# Altium PCB MCU_Control_Board.PcbDoc (part 2 of 2)
Units mil, origin at the board's own origin, x right, y up, seen from the top; angles counter-clockwise.
Board outline 5526.15 x 3406.41 mil, 2 copper layers (Top Layer, Bottom Layer); 103 components, 170 nets, 494 pads, 166 vias.
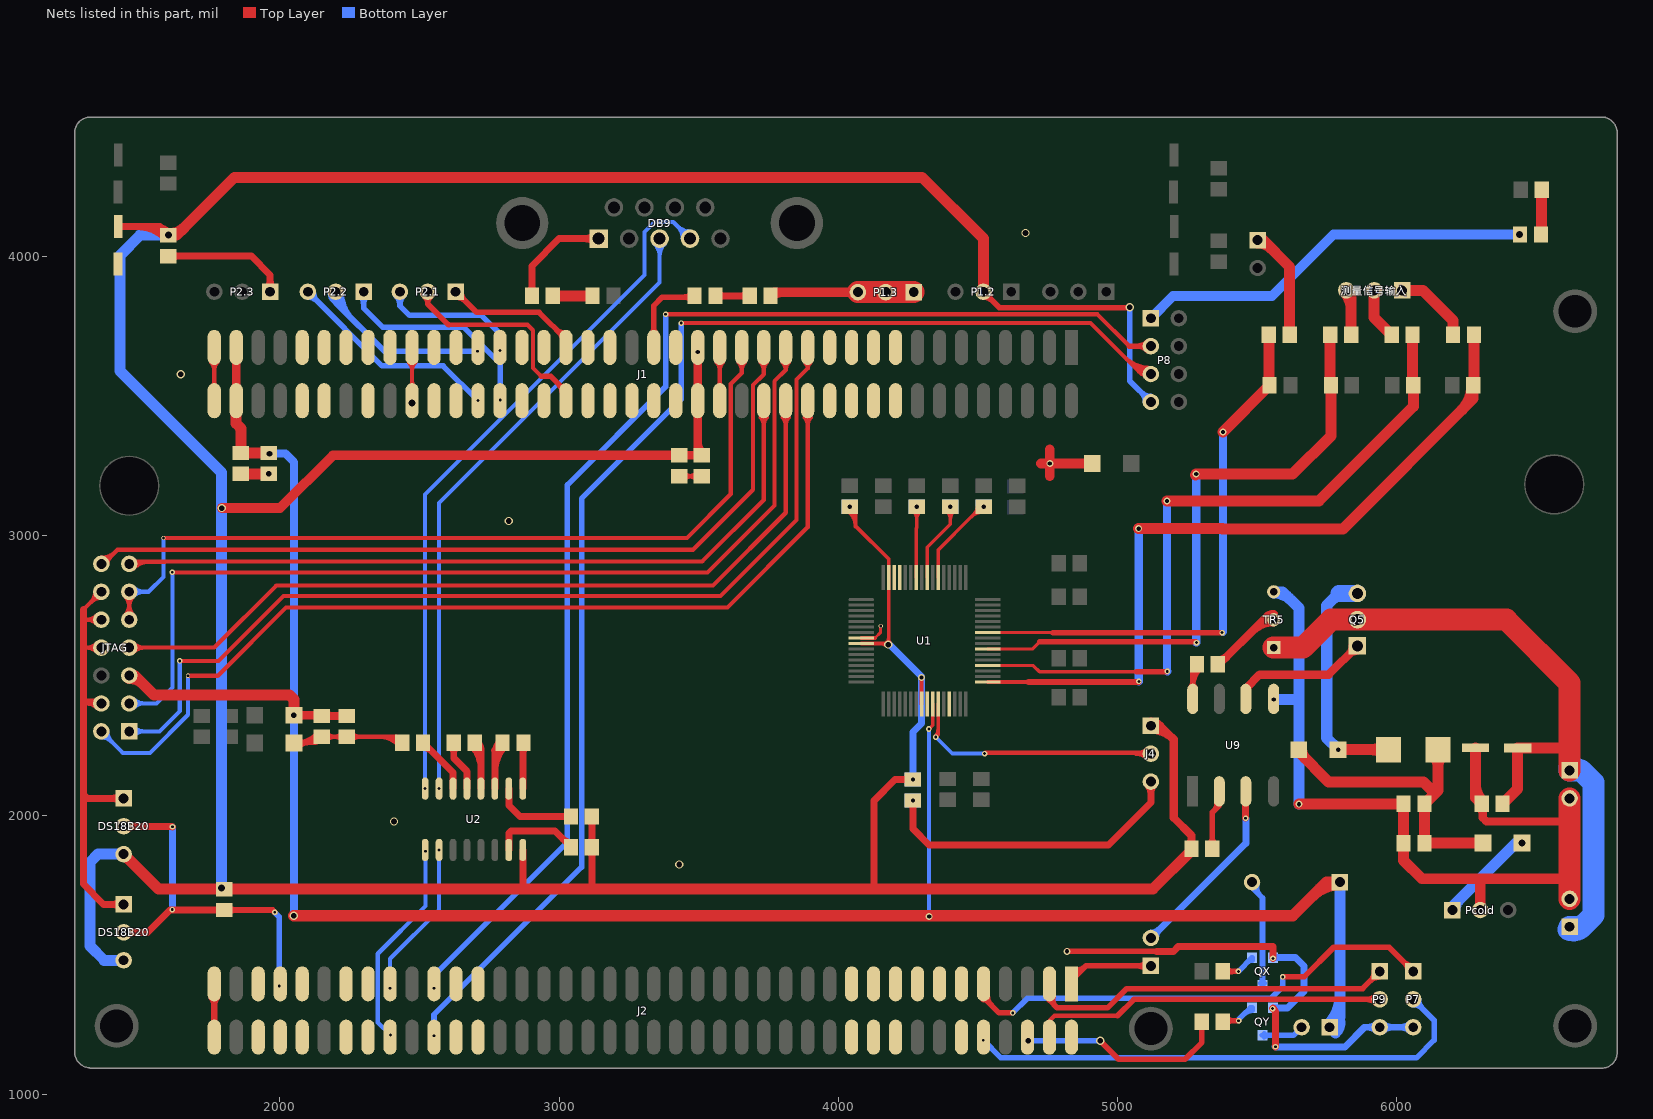
[diagram p2: the nets of this part, all layers, seen from the top]

## Via types
v1: diameter 20, hole 10, Top Layer to Bottom Layer, 45 vias
v2: diameter 25, hole 15, Top Layer to Bottom Layer, 30 vias
v3: diameter 30, hole 20, Top Layer to Bottom Layer, 26 vias
v4: diameter 19, hole 11, Top Layer to Bottom Layer, 13 vias
v5: diameter 35, hole 25, Top Layer to Bottom Layer, 10 vias
v6: diameter 17, hole 11, Top Layer to Bottom Layer, 9 vias
v7: diameter 40, hole 25, Top Layer to Bottom Layer, 8 vias
v8: diameter 20, hole 10.13, Top Layer to Bottom Layer, 7 vias
v9: diameter 20, hole 15, Top Layer to Bottom Layer, 5 vias
v10: diameter 15, hole 10, Top Layer to Bottom Layer, 4 vias
v11: diameter 25, hole 15.13, Top Layer to Bottom Layer, 2 vias
v12: diameter 20, hole 12, Top Layer to Bottom Layer, 2 vias
v13: diameter 39.37, hole 20.13, Top Layer to Bottom Layer, 2 vias
v14: diameter 15, hole 11, Top Layer to Bottom Layer, 1 vias
v15: diameter 17, hole 10, Top Layer to Bottom Layer, 1 vias
v16: diameter 17, hole 9, Top Layer to Bottom Layer, 1 vias

## Nets (pads, with @x,y where several pads share a name; then routed paths per layer and width w, separated by ;. In a path a pad name is that pad's centre, name@x,y a point inside that pad or via, vN(x,y) a via of type N, cw(c..) or ccw(c..) an arc to the next point about the centre after c; other vN are vias at no path point) (continued)
DGND: C1.1 C2.1 C3.1 C4.1 C05.2 C06.2 C07.1 C08.1 C14.2 C15.2 C26.2 C27.2 D0.2 D1.2 D2.2 DB9.5 DS18B20.1 J1.33 J1.34 J1.61 J1.62 J1.79 J1.80 J2.79 J2.80 J4.3 JTAG.4 JTAG.8 JTAG.10 JTAG.12 L0.1 L2.2 P1.3.1 P1.3.2 P1.3.3 P2.3.1 P7.3 P8.1 P9.3 QX.2 QY.2 U1.8 U1.25 U1.29 U1.61 U1.62 U2.15 | length 13718
  Top Layer w11: 4131.65,2634.29 4152,2654.63 v10(4152,2677)
  Top Layer w13: U1.8@4082.48,2634.29 4131.65,2634.29
  Top Layer w15: 1296,2592.5 1303.5,2600 JTAG.8@1360,2600 ; 1296,2736 JTAG.12@1360,2800 ; 1296.5,2700 1296,2700.5 1359.5,2700.5 JTAG.10@1360,2700 ; J1.80@1753.17,3526.4 ccw(c1725.64,3553.92) 1764.57,3553.92 ccw(c1803.49,3553.92) J1.80@1775.97,3526.4 ; J1.79@1753.17,3621.6 cw(c1725.64,3594.08) 1764.57,3594.08 cw(c1803.49,3594.08) J1.79@1775.97,3621.6 ; J1.80@1757.34,3526.38 ccw(c1739.9,3543.82) 1764.57,3543.82 ccw(c1789.23,3543.82) J1.80@1771.79,3526.38 ; J1.79@1757.34,3622.62 cw(c1739.9,3605.18) 1764.57,3605.18 cw(c1789.23,3605.18) J1.79@1771.79,3622.62 ; J1.80@1764.57,3489.63 J1.79@1764.57,3659.37 ; C14.2@2437.6,2260 2417,2280.6 C05.2@2240,2280.6 C06.2@2150,2280.6 2127.4,2258 L0.1@2050,2258 ; J1.62@2461.83,3526.4 ccw(c2434.31,3553.92) 2473.23,3553.92 ccw(c2512.15,3553.92) J1.62@2484.63,3526.4 ; J1.61@2461.83,3621.6 cw(c2434.31,3594.08) 2473.23,3594.08 cw(c2512.15,3594.08) J1.61@2484.63,3621.6 ; J1.62@2466,3526.38 ccw(c2448.56,3543.82) 2473.23,3543.82 ccw(c2497.89,3543.82) J1.62@2480.45,3526.38 ; J1.61@2466,3622.62 cw(c2448.56,3605.18) 2473.23,3605.18 cw(c2497.89,3605.18) J1.61@2480.45,3622.62 ; J1.62@2473.23,3489.63 J1.61@2473.23,3659.37 ; C1.1@3430.5,3214.1 C2.1@3510.5,3214.1 ; J1.34@3564.19,3526.4 ccw(c3536.67,3553.92) 3575.59,3553.92 ccw(c3614.51,3553.92) J1.34@3586.99,3526.4 ; J1.33@3564.19,3621.6 cw(c3536.67,3594.08) 3575.59,3594.08 cw(c3614.51,3594.08) J1.33@3586.99,3621.6 ; J1.34@3568.37,3526.38 ccw(c3550.93,3543.82) 3575.59,3543.82 ccw(c3600.26,3543.82) J1.34@3582.82,3526.38 ; J1.33@3568.37,3622.62 cw(c3550.93,3605.18) 3575.59,3605.18 cw(c3600.26,3605.18) J1.33@3582.82,3622.62 ; J1.34@3575.59,3489.63 J1.33@3575.59,3659.37 ; P1.3.3@4057,3860 P1.3.3@4070.5,3873.5 ; 1306.82,2600 cw(c1306.82,2546.82) 1344.42,2584.42 ccw(c1306.82,2546.82) 1306.82,2600 ; 1306.82,2600 ccw(c1306.82,2653.18) 1344.42,2615.58 cw(c1306.82,2653.18) 1306.82,2600 ; 1322.4,2762.4 cw(c1360,2724.79) 1360,2777.97 ccw(c1360,2724.79) 1322.4,2762.4 ; 1322.4,2762.4 ccw(c1284.79,2800) 1337.97,2800 cw(c1284.79,2800) 1322.4,2762.4 ; L0.1@2050,2258 ccw(c2050.01,2373.64) 2133.07,2293.18 cw(c2050.01,2373.64) L0.1@2050,2258 ; 2104.32,2258 cw(c2104.32,2312.32) 2065.91,2273.91 ccw(c2104.32,2312.32) 2104.32,2258 ; 2104.32,2258 ccw(c2104.32,2203.68) 2065.91,2242.09 cw(c2104.32,2203.68) 2104.32,2258 ; 2192.39,2280.6 cw(c2192.39,2236.92) 2223.27,2267.81 ccw(c2192.39,2236.92) 2192.39,2280.6 ; 2192.39,2280.6 ccw(c2192.39,2324.27) 2223.27,2293.39 cw(c2192.39,2324.27) 2192.39,2280.6 ; 2197.61,2280.6 cw(c2197.61,2324.27) 2166.73,2293.39 ccw(c2197.61,2324.27) 2197.61,2280.6 ; 2197.61,2280.6 ccw(c2197.61,2236.92) 2166.73,2267.81 cw(c2197.61,2236.92) 2197.61,2280.6 ; 2287.61,2280.6 cw(c2287.61,2324.27) 2256.73,2293.39 ccw(c2287.61,2324.27) 2287.61,2280.6 ; 2287.61,2280.6 ccw(c2287.61,2236.92) 2256.73,2267.81 cw(c2287.61,2236.92) 2287.61,2280.6 ; 3462.89,3214.1 cw(c3462.89,3170.42) 3493.77,3201.31 ccw(c3462.89,3170.42) 3462.89,3214.1 ; 3462.89,3214.1 ccw(c3462.89,3257.77) 3493.77,3226.89 cw(c3462.89,3257.77) 3462.89,3214.1 ; 3478.11,3214.1 cw(c3478.11,3257.77) 3447.23,3226.89 ccw(c3478.11,3257.77) 3478.11,3214.1 ; 3478.11,3214.1 ccw(c3478.11,3170.42) 3447.23,3201.31 cw(c3478.11,3170.42) 3478.11,3214.1 ; 1305.61,2700.5 cw(c1305.61,2645.61) 1344.42,2684.42 ccw(c1305.61,2645.61) 1305.61,2700.5 ; 1308.03,2700.5 ccw(c1308.03,2751.97) 1344.42,2715.58 cw(c1308.03,2751.97) 1308.03,2700.5 ; 2085.42,2258 ccw(c2085.42,2339.34) 2143.84,2282.75 cw(c2085.42,2339.34) 2085.42,2258 ; C06.2@2120.83,2258 ccw(c2120.83,2305.04) 2154.62,2272.31 cw(c2120.83,2305.04) C06.2@2120.83,2258 ; 2353.7,2280.6 cw(c2353.7,2180.04) 2424.81,2251.15 ccw(c2353.7,2180.04) 2353.7,2280.6 ; 2389.91,2280.6 cw(c2389.91,2216.25) 2435.41,2261.75 ccw(c2389.91,2216.25) 2389.91,2280.6
  Top Layer w20: v2@4818.5,1512.5 v2(4819.03,1511.97) 5140.42,1511.97
  Top Layer w25: 1296,2736 1296,2700.5 1296,2592.5 1296,2404.5 ; JTAG.4@1360,2400 1355.5,2404.5 1296,2404.5 ; DS18B20.1@1440,1680 1368.5,1680 1296,1752.5 1296,2074 ; DS18B20.1@1440,2060 1310,2060 1296,2074 ; C08.1@1600,4002.6 1897.9,4002.6 1965,3935.5 P2.3.1@1965,3875 ; J2.80@1756.7,1242.86 ccw(c1737.72,1261.85) 1764.57,1261.85 ccw(c1791.42,1261.85) J2.80@1772.43,1242.86 ; J2.79@1756.7,1345.14 cw(c1737.72,1326.15) 1764.57,1326.15 cw(c1791.42,1326.15) J2.79@1772.43,1345.14 ; J2.80@1764.57,1209.63 J2.79@1764.57,1379.37 ; U2.15@2820,1875 2820,1935.5 2827.5,1943 2984.6,1943 C15.2@3042.6,1885 ; D2.2@2902.6,3860 2902.6,3967.6 3000.08,4065.08 DB9.5@3141.89,4065.08 ; v2(4267.5,2052.6) 4267.5,1951 4325,1893.5 4968.5,1893.5 5120,2045 J4.3@5120,2120 ; 5140.42,1511.97 5200.97,1511.97 5218,1529 5557.5,1529 v1(5557.5,1486.5) ; v1(5556,1307) 5566.5,1296.5 v1(5566.5,1170) ; 1296,2074 1296,2404.5 ; 1398.89,1680 cw(c1398.89,1638.89) 1427.96,1667.96 ccw(c1398.89,1638.89) 1398.89,1680 ; 1398.89,1680 ccw(c1398.89,1721.11) 1427.96,1692.04 cw(c1398.89,1721.11) 1398.89,1680 ; 1398.89,2060 cw(c1398.89,2018.89) 1427.96,2047.96 ccw(c1398.89,2018.89) 1398.89,2060 ; 1398.89,2060 ccw(c1398.89,2101.11) 1427.96,2072.04 cw(c1398.89,2101.11) 1398.89,2060 ; 1635.54,4002.6 cw(c1635.54,4034.2) 1613.19,4011.85 ccw(c1635.54,4034.2) 1635.54,4002.6 ; 1635.54,4002.6 ccw(c1635.54,3971) 1613.19,3993.34 cw(c1635.54,3971) 1635.54,4002.6 ; 1965,3916.11 cw(c1923.89,3916.11) 1952.96,3887.04 ccw(c1923.89,3916.11) 1965,3916.11 ; 1965,3916.11 ccw(c2006.11,3916.11) 1977.04,3887.04 cw(c2006.11,3916.11) 1965,3916.11 ; 2902.6,3895.54 cw(c2870.99,3895.54) 2893.34,3873.19 ccw(c2870.99,3895.54) 2902.6,3895.54 ; 2902.6,3895.54 ccw(c2934.2,3895.54) 2911.85,3873.19 cw(c2934.2,3895.54) 2902.6,3895.54 ; 3091.75,4065.08 cw(c3091.75,4014.94) 3127.2,4050.39 ccw(c3091.75,4014.94) 3091.75,4065.08 ; 3091.75,4065.08 ccw(c3091.75,4115.22) 3127.2,4079.76 cw(c3091.75,4115.22) 3091.75,4065.08 ; 4267.5,2021 cw(c4299.1,2021) 4276.76,2043.34 ccw(c4299.1,2021) 4267.5,2021 ; 4267.5,2021 ccw(c4235.9,2021) 4258.24,2043.34 cw(c4235.9,2021) 4267.5,2021 ; 5120,2078.89 cw(c5161.11,2078.89) 5132.04,2107.96 ccw(c5161.11,2078.89) 5120,2078.89 ; 5120,2078.89 ccw(c5078.89,2078.89) 5107.96,2107.96 cw(c5078.89,2078.89) 5120,2078.89 ; 1308.03,2404.5 cw(c1308.03,2348.03) 1347.96,2387.96 ccw(c1308.03,2348.03) 1308.03,2404.5 ; 1329.76,2404.5 ccw(c1329.76,2430.24) 1347.96,2412.04 cw(c1329.76,2430.24) 1329.76,2404.5 ; 3013.53,1914.07 ccw(c3042.6,1943.14) 3042.6,1902.03 cw(c3042.6,1943.14) 3013.53,1914.07 ; v1@5557.77,1308.77 cw(c5536.69,1287.69) 5566.5,1287.69 ccw(c5536.69,1287.69) v1@5557.77,1308.77
  Top Layer w35: D1.2@3757.4,3860 3770.9,3873.5 P1.3.3@4070.5,3873.5 ; 4726.5,3260 v2(4758,3260) ; v2@4757,3259 v2(4758,3260) ; 4758,3214 v2(4758,3260) ; 4758,3311 v2(4758,3260) ; L2.2@4901.16,3251.16 ccw(c4879.82,3229.82) 4879.82,3260 ccw(c4879.82,3290.18) L2.2@4901.16,3268.84 ; L2.2@4910,3260 v2(4758,3260) ; D1.2@3763.12,3858.22 cw(c3800.02,3821.32) 3800.02,3873.5 ccw(c3800.02,3821.32) D1.2@3763.12,3858.22
  Top Layer w39.37: C3.1@1860,3222.6 v3(1960,3222.6)
  Top Layer w78.74: P1.3.3@4070.5,3873.5 P1.3.2@4170.5,3873.5 P1.3.1@4270.5,3873.5
  Bottom Layer w25: QY.2@5557.4,1309.21 5610.21,1309.21 5669,1368 5669,1459 5638.79,1489.21 QX.2@5557.4,1489.21 ; v1@5565.5,1171 v1(5566.5,1170) 5815,1170 5885,1240 P9.3@5940,1240 P7.3@6060,1240 ; 5898.89,1240 cw(c5898.89,1198.89) 5927.96,1227.96 ccw(c5898.89,1198.89) 5898.89,1240 ; 5898.89,1240 ccw(c5898.89,1281.11) 5927.96,1252.04 cw(c5898.89,1281.11) 5898.89,1240 ; 5981.11,1240 cw(c5981.11,1281.11) 5952.04,1252.04 ccw(c5981.11,1281.11) 5981.11,1240 ; 5981.11,1240 ccw(c5981.11,1198.89) 5952.04,1227.96 cw(c5981.11,1198.89) 5981.11,1240 ; 6018.89,1240 cw(c6018.89,1198.89) 6047.96,1227.96 ccw(c6018.89,1198.89) 6018.89,1240 ; 6018.89,1240 ccw(c6018.89,1281.11) 6047.96,1252.04 cw(c6018.89,1281.11) 6018.89,1240
  Bottom Layer w35: P8.1@5120,3780 5199.5,3859.5 5554,3859.5 5774.5,4080 v7(6441,4080)
  other v3: 3430.5,1823 2408.5,1977 2820,3053.5 1644.5,3580 4671,4085.5
  other v5: 2473.23,3475.63
DS18B20_A: DS18B20.2 J2.73 Rs.1 | length 1841.3
  Top Layer w20: Rs.1@1800,1660 1973.5,1660 v1(1981.5,1652) ; 1841.58,1660 cw(c1841.58,1697.64) 1814.96,1671.02 ccw(c1841.58,1697.64) 1841.58,1660 ; 1841.58,1660 ccw(c1841.58,1622.36) 1814.96,1648.98 cw(c1841.58,1622.36) 1841.58,1660 ; v1(1981.5,1652) ccw(c1962.19,1632.69) 1962.19,1660 cw(c1962.19,1632.69) v1(1981.5,1652)
  Top Layer w25: DS18B20.2@1440,1580 1526,1580 1606,1660 Rs.1@1800,1660 ; DS18B20.2@1440,1960 1613,1960 v1(1615,1958) ; 1481.11,1580 cw(c1481.11,1621.11) 1452.04,1592.04 ccw(c1481.11,1621.11) 1481.11,1580 ; 1481.11,1580 ccw(c1481.11,1538.89) 1452.04,1567.96 cw(c1481.11,1538.89) 1481.11,1580 ; 1481.11,1960 cw(c1481.11,2001.11) 1452.04,1972.04 ccw(c1481.11,2001.11) 1481.11,1960 ; 1481.11,1960 ccw(c1481.11,1918.89) 1452.04,1947.96 cw(c1481.11,1918.89) 1481.11,1960 ; 1764.46,1660 cw(c1764.46,1628.4) 1786.81,1650.74 ccw(c1764.46,1628.4) 1764.46,1660 ; 1764.46,1660 ccw(c1764.46,1691.6) 1786.81,1669.26 cw(c1764.46,1691.6) 1764.46,1660
  Bottom Layer w20: v1(1981.5,1652) 1981,1652 1997.5,1635.5 v1(1997.5,1387.5)
  Bottom Layer w25: v1(1614,1661.5) 1615,1662.5 v1(1615,1958)
DVDD3.3: C1.2 C2.2 C07.2 C08.2 C13.1 C15.1 C24.2 C25.2 C26.1 C27.1 DS18B20.3 J1.35 J1.36 J4.1 P1.2.2 P8.7 R50.2 Rs.2 U1.9 U1.24 U1.63 U2.16 | length 18565.8
  Top Layer w14: v2(4041.5,3104.6) 4062.5,3083.6 4062.5,3035.91 4180.91,2917.5 U1.63@4180.91,2850.82 v3@4180.91,2611 ; U1.9@4082.48,2614.6 v3@4175.9,2614.6 ; v2(4298.5,2492.5) 4299.02,2491.98 U1.24@4299.02,2398.07 ; C24.2@4050.89,3095.21 cw(c4060.28,3104.6) 4047,3104.6 ccw(c4060.28,3104.6) C24.2@4050.89,3095.21 ; C24.2@4050.89,3095.21 ccw(c4041.5,3085.82) 4041.5,3099.1 cw(c4041.5,3085.82) C24.2@4050.89,3095.21 ; C24.2@4034.37,3089.66 cw(c3993.01,3033.82) 4062.5,3033.82 ccw(c3993.01,3033.82) C24.2@4034.37,3089.66 ; C24.2@4042.7,3100.91 cw(c4013.6,3061.61) 4062.5,3061.61 ccw(c4013.6,3061.61) C24.2@4042.7,3100.91 ; 4151.49,2614.6 cw(c4151.49,2582.99) 4173.84,2605.34 ccw(c4151.49,2582.99) 4151.49,2614.6 ; v3@4173.84,2616.66 ccw(c4156.79,2633.71) 4180.91,2633.71 cw(c4156.79,2633.71) v3@4173.84,2616.66 ; 4180.91,2626.92 ccw(c4195.42,2626.92) 4185.16,2616.66 cw(c4195.42,2626.92) 4180.91,2626.92 ; v2@4294.61,2488.61 cw(c4283.98,2477.98) 4299.02,2477.98 ccw(c4283.98,2477.98) v2@4294.61,2488.61
  Top Layer w20: P1.2.2@4520,3875 4577.5,3817.5 4938.23,3817.5 4938.73,3817 5042.5,3817 v3(5044.5,3819) ; 4553.34,3841.66 cw(c4586.67,3875) 4539.53,3875 ccw(c4586.67,3875) 4553.34,3841.66 ; 4553.34,3841.66 ccw(c4520,3808.33) 4520,3855.47 cw(c4520,3808.33) 4553.34,3841.66 ; 5027.6,3817 ccw(c5027.6,3835.9) 5040.96,3822.54 cw(c5027.6,3835.9) 5027.6,3817
  Top Layer w25: C07.2@1421,4108 1569.4,4108 v7(1600,4077.4) ; 2855.5,1734.8 2870,1749.3 U2.16@2870,1875 U2.16@2870,1842 ; 3112,1734.8 3117.4,1740.2 C15.1@3117.4,1885 ; C15.1@3117.4,1878.52 C15.1@3117.4,1885 ; C13.1@3117.4,1995 C15.1@3117.4,1885 ; 4127.5,1734.8 4127.5,2051.52 4203.38,2127.4 v2(4267.5,2127.4) ; v3@4175.9,2614.6 v3(4179.5,2611) ; 3117.4,1849.46 cw(c3149,1849.46) 3126.66,1871.81 ccw(c3149,1849.46) 3117.4,1849.46 ; 3117.4,1849.46 ccw(c3085.8,1849.46) 3108.15,1871.81 cw(c3085.8,1849.46) 3117.4,1849.46 ; 3117.4,1920.54 cw(c3085.8,1920.54) 3108.15,1898.19 ccw(c3085.8,1920.54) 3117.4,1920.54 ; 3117.4,1920.54 ccw(c3149,1920.54) 3126.66,1898.19 cw(c3149,1920.54) 3117.4,1920.54 ; 3117.4,1959.46 cw(c3149,1959.46) 3126.66,1981.81 ccw(c3149,1959.46) 3117.4,1959.46 ; 3117.4,1959.46 ccw(c3085.8,1959.46) 3108.15,1981.81 cw(c3085.8,1959.46) 3117.4,1959.46 ; 4231.96,2127.4 cw(c4231.96,2095.8) 4254.31,2118.15 ccw(c4231.96,2095.8) 4231.96,2127.4 ; 4231.96,2127.4 ccw(c4231.96,2159) 4254.31,2136.66 cw(c4231.96,2159) 4231.96,2127.4 ; 1490.59,4108 cw(c1490.59,3971.93) 1586.81,4068.15 ccw(c1490.59,3971.93) 1490.59,4108 ; 1550.94,4108 cw(c1550.94,4032.28) 1604.48,4085.82 ccw(c1550.94,4032.28) 1550.94,4108 ; 1570.93,4106.47 cw(c1541.86,4077.4) 1582.97,4077.4 ccw(c1541.86,4077.4) 1570.93,4106.47
  Top Layer w29.37: J4.1@5120,2305.16 cw(c5120,2188.45) 5202.53,2270.97 ; J4.1@5120,2320 5153.5,2320 5202,2271.5 5202,1990.5 5265.2,1927.3 R50.2@5265.2,1880 ; J4.1@5120,2334.53 cw(c5120,2288.72) 5152.39,2321.11 ; R50.2@5257.49,1891.65 ccw(c5238.87,1910.27) 5265.2,1910.27 ccw(c5291.53,1910.27) R50.2@5272.91,1891.65
  Top Layer w30: C1.2@3430.5,3288.9 C2.2@3510.5,3288.9 3496.85,3302.55 3496.85,3489.63 v2(3496.85,3659.37) ; 3496.85,3337.92 ccw(c3555.58,3337.92) 3514.05,3296.39 cw(c3555.58,3337.92) 3496.85,3337.92
  Top Layer w35: v3(1791.5,3100) 2000.5,3100 2189.4,3288.9 C1.2@3430.5,3288.9
  Top Layer w39.37: DS18B20.3@1440,1860 1565.2,1734.8 Rs.2@1800,1734.8 2855.5,1734.8 3112,1734.8 4127.5,1734.8 5126.8,1734.8 R50.2@5265.2,1873.2 ; v7(1600,4077.4) 1630.03,4077.4 1837.63,4285 4300,4285 4520,4065 P1.2.2@4520,3875 ; C08.2@1600,4077.72 ccw(c1600,4150.97) 1651.8,4099.17 cw(c1600,4150.97) C08.2@1600,4077.72 ; C08.2@1603.94,4083.31 ccw(c1603.94,4160.55) 1658.56,4105.93 cw(c1603.94,4160.55) C08.2@1603.94,4083.31
  Bottom Layer w14: v2(4298.5,2492.5) v2@4298.5,2496.5
  Bottom Layer w20: v3(5044.5,3819) 5044.5,3555.5 P8.7@5120,3480 ; 5086.66,3513.34 cw(c5053.33,3480) 5100.47,3480 ccw(c5053.33,3480) 5086.66,3513.34 ; 5086.66,3513.34 ccw(c5120,3546.67) 5120,3499.53 cw(c5120,3546.67) 5086.66,3513.34
  Bottom Layer w25: v3(4179.5,2611) 4184,2611 v2@4298.5,2496.5 ; v2(4267.5,2127.4) 4267.5,2297.5 4298.5,2328.5 v2(4298.5,2492.5) ; 4267.5,2159 cw(c4235.9,2159) 4258.24,2136.66 ccw(c4235.9,2159) 4267.5,2159 ; 4267.5,2159 ccw(c4299.1,2159) 4276.76,2136.66 cw(c4299.1,2159) 4267.5,2159
  Bottom Layer w35: v3@1790.5,3101 v3(1791.5,3100)
  Bottom Layer w39.37: DS18B20.3@1440,1480 1370.5,1480 1319,1531.5 1319,1831 1348,1860 DS18B20.3@1440,1860 ; v7(1600,4077.4) 1498.4,4077.4 1426.5,4005.5 1426.5,3591.5 1790.5,3227.5 1790.5,3101 v7(1790.5,1739)
DVDD5.0: BX.1 C3.2 C4.2 C05.1 C06.1 J1.77 J1.78 JTAG.5 L1.1 U1.26 风扇5V.1 | length 9344.5
  Top Layer w13: v1(4324.89,2308.5) 4338.39,2322 U1.26@4338.39,2398.07 ; v2(4326,1636.73) v2@4326,1639
  Top Layer w29.53: J1.78@1843.31,3489.63 J1.77@1843.31,3659.37 ; C4.2@1960,3297.4 v3(1962.4,3295) ; v3(2050,2358) 2147.4,2358 C06.1@2150,2355.4 C05.1@2240,2355.4 ; 2086.78,2358 cw(c2086.78,2394.78) 2060.77,2368.77 ccw(c2086.78,2394.78) 2086.78,2358 ; 2086.78,2358 ccw(c2086.78,2321.22) 2060.77,2347.23 cw(c2086.78,2321.22) 2086.78,2358 ; 2180.07,2355.4 cw(c2180.07,2381.54) 2161.59,2363.06 ccw(c2180.07,2381.54) 2180.07,2355.4 ; 2180.07,2355.4 ccw(c2180.07,2329.26) 2161.59,2347.75 cw(c2180.07,2329.26) 2180.07,2355.4 ; 2209.93,2355.4 cw(c2209.93,2329.26) 2228.41,2347.75 ccw(c2209.93,2329.26) 2209.93,2355.4 ; 2209.93,2355.4 ccw(c2209.93,2381.54) 2228.41,2363.06 cw(c2209.93,2381.54) 2209.93,2355.4 ; 2113.65,2358 cw(c2113.65,2322.99) 2138.41,2347.75 ccw(c2113.65,2322.99) 2113.65,2358
  Top Layer w39.37: JTAG.5@1460,2500 1479.5,2500 1548.5,2431 2033.5,2431 2050,2414.5 v3(2050,2358) ; J1.78@1843.31,3489.63 1843.31,3402.19 1860,3385.5 C3.2@1860,3297.4 C4.2@1960,3297.4 ; JTAG.5@1460,2490.16 cw(c1460,2419.32) 1510.09,2469.41 ccw(c1460,2419.32) JTAG.5@1460,2490.16
  Top Layer w40.53: v3(2049.5,1639) 4326,1639 5628,1639 5749,1760 BX.1@5797.48,1760 ; 5698.91,1709.91 cw(c5797.48,1611.33) 5797.48,1750.74 ccw(c5797.48,1611.33) 5698.91,1709.91 ; 5724.76,1735.76 cw(c5771.77,1688.75) 5794.34,1751.29 ccw(c5771.77,1688.75) 5724.76,1735.76
  Bottom Layer w13: v2@4324.89,1635.61 v2(4326,1636.73)
  Bottom Layer w15: v2@4324.89,1635.61 v1(4324.89,2308.5) ; 4324.89,1651.49 ccw(c4340.76,1651.49) 4329.54,1640.26 cw(c4340.76,1651.49) 4324.89,1651.49
  Bottom Layer w29.53: v3(1962.4,3295) 2019.5,3295 2050,3264.5 v3(2050,2358) 2050,1639.5 v3(2049.5,1639)
  Bottom Layer w39.37: 风扇5V.1@5760,1240 5797.48,1277.48 BX.1@5797.48,1760 ; 风扇5V.1@5753.04,1246.96 ccw(c5645.75,1354.25) 5797.48,1354.25 cw(c5645.75,1354.25) 风扇5V.1@5753.04,1246.96 ; 风扇5V.1@5780.88,1219.12 ccw(c5740.8,1259.2) 5797.48,1259.2 cw(c5740.8,1259.2) 风扇5V.1@5780.88,1219.12
ECAP5: J2.12
ECAP6: J2.13
EMU0: J1.30 JTAG.13 | length 3062.3
  Top Layer w15: JTAG.13@1460,2900 1467.5,2907.5 1589,2907.5 1590,2908.5 3512.5,2908.5 3733.07,3129.07 J1.30@3733.07,3489.63 ; J1.30@3721.67,3424.86 cw(c3694.15,3397.34) 3733.07,3397.34 cw(c3771.99,3397.34) J1.30@3744.47,3424.86 ; J1.30@3725.85,3452.88 cw(c3708.41,3435.44) 3733.07,3435.44 cw(c3757.74,3435.44) J1.30@3740.3,3452.88 ; 1495.07,2907.5 cw(c1495.07,2935.07) 1475.58,2915.58 ccw(c1495.07,2935.07) 1495.07,2907.5 ; 1495.07,2907.5 ccw(c1495.07,2864.93) 1464.97,2895.03 cw(c1495.07,2864.93) 1495.07,2907.5 ; JTAG.13@1475.58,2884.42 cw(c1531.29,2828.71) 1531.29,2907.5 ccw(c1531.29,2828.71) JTAG.13@1475.58,2884.42
EMU1: J1.29 JTAG.14 | length 3278.3
  Top Layer w15: JTAG.14@1360,2900 1368,2900 1418.5,2950.5 3479.5,2950.5 3694.5,3165.5 3694.5,3540.45 3733.07,3579.02 J1.29@3733.07,3659.37 ; J1.29@3721.67,3621.6 cw(c3694.15,3594.08) 3733.07,3594.08 cw(c3771.99,3594.08) J1.29@3744.47,3621.6 ; J1.29@3725.85,3622.62 cw(c3708.41,3605.18) 3733.07,3605.18 cw(c3757.74,3605.18) J1.29@3740.3,3622.62 ; JTAG.14@1360,2907.03 ccw(c1360,2943.31) 1385.65,2917.65 cw(c1360,2943.31) JTAG.14@1360,2907.03 ; JTAG.14@1360,2922.03 ccw(c1360,2994.52) 1411.26,2943.26 cw(c1360,2994.52) JTAG.14@1360,2922.03 ; JTAG.14@1382.03,2900 cw(c1415.89,2900) 1391.95,2923.95 ccw(c1415.89,2900) JTAG.14@1382.03,2900
EQEP1A: J2.9 P7.1 | length 1967.1
  Top Layer w20: J2.9@4520.47,1339.38 cw(c4520.47,1319.7) 4534.38,1333.62 ; J2.9@4520.47,1379.37 4520.47,1347.53 4576.5,1291.5 v1(4625,1291.5) ; J2.9@4528.19,1349.84 ccw(c4552.41,1349.84) 4535.28,1332.72 ; J2.9@4534.1,1353 ccw(c4580.19,1353) 4547.6,1320.4 ; v1(5592.5,1420.5) 5669,1420.5 5775,1526.5 5973.5,1526.5 P7.1@6060,1440 ; 6026.66,1473.34 cw(c5993.33,1440) 6040.47,1440 ccw(c5993.33,1440) 6026.66,1473.34 ; 6026.66,1473.34 ccw(c6060,1506.67) 6060,1459.53 cw(c6060,1506.67) 6026.66,1473.34
  Bottom Layer w20: v1(4625,1291.5) 4677.41,1343.91 5551,1343.91 5592.5,1385.41 v1(5592.5,1420.5)
EQEP1B: J2.10 P7.2 | length 1993.1
  Bottom Layer w20: v1(4519.5,1193.5) 4582.5,1130.5 6071.5,1130.5 6135,1194 6135,1265 P7.2@6060,1340 ; 6093.34,1306.66 cw(c6126.67,1340) 6079.53,1340 ccw(c6126.67,1340) 6093.34,1306.66 ; 6093.34,1306.66 ccw(c6060,1273.33) 6060,1320.47 cw(c6060,1273.33) 6093.34,1306.66
EQEPII: J2.11
EQEPIS: J2.15
FAN_A: J2.6 RY.1 | length 749.4
  Top Layer w20: v3(4938,1191.5) 5004,1125.5 5242,1125.5 5302.6,1186.1 RY.1@5302.6,1260
  Bottom Layer w20: v3@4680,1192.5 v3(4681,1191.5) v3(4938,1191.5)
HOLD: J1.66
HOLDA: J1.67
IN+12V: BigFan.1 C51.1 C52.1 PIN12V.1 Q5.2 TR5.1 | length 3071.8
  Top Layer w39.37: C52.1@6380,2040 6434,2094 C51.1@6434,2240 6619,2240 6620,2241
  Top Layer w78.74: TR5.1@5560,2600 5665,2600 5765,2700 Q5.2@5860,2700 6393.5,2700 6620,2473.5 6620,2241 PIN12V.1@6620,2160
  Bottom Layer w78.74: BigFan.1@6620,1600 6664,1600 ; PIN12V.1@6620,2160 6661.5,2160 6705.5,2116 6705.5,1641.5 6664,1600 ; PIN12V.1@6620,2169.84 cw(c6620,2093.41) 6674.04,2147.46 ; PIN12V.1@6620,2169.84 cw(c6620,2093.41) 6674.04,2147.46 ; PIN12V.1@6620,2169.84 cw(c6620,2093.41) 6674.04,2147.46 ; PIN12V.1@6620,2169.84 cw(c6620,2093.41) 6674.04,2147.46 ; 6664,1600 cw(c6633.43,1630.57) 6616.04,1590.99 ccw(c6633.43,1630.57) 6664,1600 ; BigFan.1@6620,1590.16 ccw(c6620,1672.62) 6678.31,1614.31 cw(c6620,1672.62) BigFan.1@6620,1590.16
IN_CLK: J1.54 P2.2.1 | length 908.4
  Bottom Layer w20: P2.2.1@2300,3875 2300,3816 2368.5,3747.5 2658.77,3747.5 2789.5,3616.77 v1(2789.5,3487.5) ; 2300,3827.86 cw(c2347.14,3827.86) 2313.81,3861.19 ccw(c2347.14,3827.86) 2300,3827.86 ; 2300,3827.86 ccw(c2252.86,3827.86) 2286.19,3861.19 cw(c2252.86,3827.86) 2300,3827.86
IN_CS1: J1.47 P2.1.1 | length 741.4
  Top Layer w20: P2.1.1@2631,3875 2705,3801 2928.5,3801 3024.41,3705.09 J1.47@3024.41,3659.37 ; 2989.8,3739.7 ccw(c3024.41,3774.3) J1.47@3024.41,3725.36 ; 2999.79,3729.71 cw(c2958.97,3688.9) J1.47@3016.69,3688.9 ; P2.1.1@2629.5,3855.47 cw(c2629.5,3804.71) 2665.4,3840.6 ccw(c2629.5,3804.71) P2.1.1@2629.5,3855.47 ; P2.1.1@2649.03,3875 ccw(c2692.55,3875) 2661.77,3844.23 cw(c2692.55,3875) P2.1.1@2649.03,3875
IN_CS2: J1.48 P2.1.2 | length 997.5
  Top Layer w15: 2604.34,3756.5 2887,3756.5 2906.5,3737 2906.5,3601.5 2936.5,3571.5
  Top Layer w20: P2.1.2@2529.5,3854 P2.1.2@2529.5,3875 2529.5,3831.34 ; 2604.34,3756.5 2529.5,3831.34 ; 2936.5,3571.5 2970.5,3571.5 3024.41,3517.59 J1.48@3024.41,3489.63 ; 2999.32,3542.68 cw(c2971.65,3515) J1.48@3010.79,3515 ; J1.48@3005.58,3536.42 ccw(c3024.41,3555.25) J1.48@3024.41,3528.62 ; J1.48@3008.56,3533.44 ccw(c3024.41,3549.29) J1.48@3024.41,3526.87 ; 2529.5,3831.35 cw(c2568.53,3831.35) 2542.52,3860.44 ccw(c2568.53,3831.35) 2529.5,3831.35 ; 2529.5,3831.35 ccw(c2490.47,3831.35) 2516.48,3860.44 cw(c2490.47,3831.35) 2529.5,3831.35
IN_CS3: J1.53 P2.1.3 | length 685.4
  Top Layer w20: J1.53@2788.19,3659.37 v1(2788.19,3664.19)
  Bottom Layer w20: P2.1.3@2423.5,3875 2430,3868.5 2430,3824.5 2464,3790.5 2722,3790.5 2788.19,3724.31 v1(2788.19,3664.19) ; P2.1.3@2429.5,3855.5 P2.1.3@2429.5,3875 ; P2.1.3@2415.69,3861.19 cw(c2381.15,3826.65) 2430,3826.65 ccw(c2381.15,3826.65) P2.1.3@2415.69,3861.19 ; 2430,3829.06 cw(c2475.44,3829.06) 2443.31,3861.19 ccw(c2475.44,3829.06) 2430,3829.06
IN_IOLED: J1.56 P2.2.3 | length 918.6
  Bottom Layer w20: P2.2.3@2100,3875 2365.5,3609.5 2584.5,3609.5 v1(2709,3485) ; 2133.34,3841.66 cw(c2166.67,3875) 2119.53,3875 ccw(c2166.67,3875) 2133.34,3841.66 ; 2133.34,3841.66 ccw(c2100,3808.33) 2100,3855.47 cw(c2100,3808.33) 2133.34,3841.66
IN_SIMO: J1.55 P2.2.2 | length 1300.6
  Bottom Layer w20: P2.2.2@2200,3859 P2.2.2@2200,3875 2200,3835.5 ; v1(2707.5,3662) 2373.5,3662 2200,3835.5 ; P2.2.2@2188.14,3859.48 cw(c2169.82,3835.5) 2200,3835.5 ; P2.2.2@2188.14,3859.48 cw(c2169.82,3835.5) 2200,3835.5 ; P2.2.2@2188.14,3859.48 cw(c2169.82,3835.5) 2200,3835.5 ; P2.2.2@2188.14,3859.48 cw(c2169.82,3835.5) 2200,3835.5 ; 2200,3835.5 cw(c2230.18,3835.5) P2.2.2@2211.86,3859.48 ; 2200,3835.5 cw(c2230.18,3835.5) P2.2.2@2211.86,3859.48 ; 2200,3835.5 cw(c2230.18,3835.5) P2.2.2@2211.86,3859.48 ; 2200,3835.5 cw(c2230.18,3835.5) P2.2.2@2211.86,3859.48 ; P2.2.2@2179.53,3875 ccw(c2225.46,3875) 2192.98,3842.52 cw(c2225.46,3875) P2.2.2@2179.53,3875 ; P2.2.2@2199.53,3875 ccw(c2293.75,3875) 2227.12,3808.38 cw(c2293.75,3875) P2.2.2@2199.53,3875 ; P2.2.2@2219.53,3875 ccw(c2362.03,3875) 2261.27,3774.23 cw(c2362.03,3875) P2.2.2@2219.53,3875
INAGND: BigFan.2 C51.2 C52.2 C53.2 C54.2 Pcold.2 PIN12V.2 TR5.3 U9.5 | length 3510.2
  Top Layer w29.37: C52.2@6305.2,2040 6309,2036.2 6309,1990.5 6322,1977.5 6616.5,1977.5 6620,1981 ; C52.2@6297.49,2028.35 cw(c6269.69,2000.55) 6309,2000.55 ccw(c6269.69,2000.55) C52.2@6297.49,2028.35
  Top Layer w39.37: v11(5650.5,2039) 6024.2,2039 C53.2@6025.2,2040 C54.2@6025.2,1900 6025.2,1837.5 6090.7,1772 6293.5,1772 ; C51.2@6283,2241 6283,2062.2 C52.2@6305.2,2040 ; Pcold.2@6300,1687.5 Pcold.2@6300,1660 6300,1765.5 6293.5,1772 ; 6620,1772 6293.5,1772 ; 6283,2111.78 ccw(c6373.04,2111.78) 6309.37,2048.11 cw(c6373.04,2111.78) 6283,2111.78
  Top Layer w78.74: BigFan.2@6620,1700 6620,1772 6620,1981 PIN12V.2@6620,2060
  Bottom Layer w39.37: TR5.3@5560,2796.06 cw(c5560,2709.3) 5621.35,2770.65 ; TR5.3@5560,2800 5592,2800 5650.5,2741.5 5650.5,2414 ; v9(5560.5,2414) 5650.5,2414 ; TR5.3@5561.07,2796.21 cw(c5574.14,2750.14) 5608,2784 ; v11(5650.5,2039) 5650.5,2414
MCLKRA: J2.65
MCLKRB: J2.56
MCLKXA: J2.66
MDRA: J2.67
MDXA: J2.68
MFSRB: J2.58
NetBX_2: BX.2 QX.3 | length 531.5
  Bottom Layer w20: BX.2@5482.52,1760 5482.52,1740.48 5520,1703 QX.3@5520,1390.79 ; 5520,1410.4 cw(c5501.37,1410.4) 5514.54,1397.23 ccw(c5501.37,1410.4) 5520,1410.4 ; 5520,1410.4 ccw(c5538.63,1410.4) 5525.46,1397.23 cw(c5538.63,1410.4) 5520,1410.4 ; BX.2@5500.95,1753.54 ccw(c5538.01,1740.54) 5510.24,1712.76 cw(c5538.01,1740.54) BX.2@5500.95,1753.54
NetC11_1: C11.1 U2.3 | length 541.5
  Top Layer w25: U2.3@2770,2095 2770,2232.4 C11.1@2797.6,2260 ; 2768.53,2230.93 cw(c2797.6,2201.86) 2797.6,2242.97 ccw(c2797.6,2201.86) 2768.53,2230.93 ; 2770,2157.83 cw(c2895.83,2157.83) 2806.85,2246.81 ccw(c2895.83,2157.83) 2770,2157.83 ; 2770,2218.19 cw(c2835.48,2218.19) 2789.18,2264.48 ccw(c2835.48,2218.19) 2770,2218.19
NetC11_2: C11.2 U2.1 | length 265.3
  Top Layer w25: U2.1@2870,2095 2870,2257.6 C11.2@2872.4,2260 ; C11.2@2863.15,2246.81 cw(c2846.6,2230.26) 2870,2230.26 ccw(c2846.6,2230.26) C11.2@2863.15,2246.81 ; 2870,2218.66 cw(c2909.8,2218.66) 2881.66,2246.81 ccw(c2909.8,2218.66) 2870,2218.66
NetC12_1: C12.1 U2.5 | length 283.9
  Top Layer w25: C12.1@2622.6,2260 2622.6,2204.4 2670,2157 U2.5@2670,2095 ; 2622.6,2224.46 cw(c2654.2,2224.46) 2631.85,2246.81 ccw(c2654.2,2224.46) 2622.6,2224.46 ; 2622.6,2224.46 ccw(c2591,2224.46) 2613.34,2246.81 cw(c2591,2224.46) 2622.6,2224.46
NetC12_2: C12.2 U2.4 | length 421.2
  Top Layer w25: C12.2@2697.4,2260 2720,2237.4 U2.4@2720,2095 ; C12.2@2688.15,2246.81 cw(c2611.24,2169.9) 2720,2169.9 ccw(c2611.24,2169.9) C12.2@2688.15,2246.81 ; C12.2@2705.82,2264.48 cw(c2671.6,2230.26) 2720,2230.26 ccw(c2671.6,2230.26) C12.2@2705.82,2264.48
NetC13_2: C13.2 U2.2 | length 398.7
  Top Layer w25: U2.2@2820,2095 2820,2034.5 2859.5,1995 C13.2@3042.6,1995 ; 3011,1995 cw(c3011,1963.4) 3033.34,1985.74 ccw(c3011,1963.4) 3011,1995 ; 3011,1995 ccw(c3011,2026.6) 3033.34,2004.26 cw(c3011,2026.6) 3011,1995
NetC14_1: C14.1 U2.6 | length 274.1
  Top Layer w25: C14.1@2512.4,2260 2620,2152.4 U2.6@2620,2095 ; C14.1@2512.4,2242.97 cw(c2512.4,2201.86) 2541.47,2230.93 ccw(c2512.4,2201.86) C14.1@2512.4,2242.97
NetC42_2: C42.2 R20.1 U1.42 | length 1977.3
  Top Layer w12: U1.42@4535.24,2653.97 4769.47,2653.97
  Top Layer w20: 4769.47,2653.97 v8(5374.97,2653.97)
  Top Layer w39.37: v2(5378,3372.8) C42.2@5545.2,3540 5542.6,3542.6 R20.1@5542.6,3720
  Bottom Layer w12: v8(5374.97,2653.97) v8@5378,2657
  Bottom Layer w29.53: v8@5378,2657 v2(5378,3372.8)
NetC43_2: C43.2 R21.1 U1.39 | length 2270.4
  Top Layer w12: U1.39@4535.24,2594.92 4695.42,2594.92 4721.5,2621
  Top Layer w20: 4721.5,2621 5073.5,2621 5280.5,2621 v8(5283.5,2618)
  Top Layer w39.37: v2@5279.5,3218.5 v2(5282.5,3221.5) 5628,3221.5 5765.2,3358.7 C43.2@5765.2,3540 5762.6,3542.6 R21.1@5762.6,3720
  Bottom Layer w29.53: v2(5282.5,3221.5) 5282.5,2619 v8(5283.5,2618)
NetC44_2: C44.2 R22.1 U1.36 | length 2545.1
  Top Layer w12: U1.36@4535.24,2535.86 4698.14,2535.86 ; 4699.24,2534.76 4698.14,2535.86 ; 5068.5,2513 4721,2513 4698.14,2535.86
  Top Layer w20: 5068.5,2513 5176.5,2513 v8(5178.5,2515)
  Top Layer w39.37: v2(5178,3125.5) 5721.5,3125.5 6060,3464 C44.2@6060,3540 6057.4,3542.6 R22.1@6057.4,3720
  Bottom Layer w20: v8(5178.5,2515) v8@5179.5,2515
  Bottom Layer w29.53: v8@5178,2516.5 v2(5178,3125.5) ; v8@5179,2515.5 v8@5179.5,2515
NetC45_2: C45.2 R23.1 U1.33 | length 2897
  Top Layer w13: U1.33@4535.24,2476.81 4681.51,2476.81
  Top Layer w20: 4681.51,2476.81 4985.5,2476.81 v8@5077,2476.81
  Top Layer w39.37: v2(5076.5,3026) 5376,3026 ; 5376.5,3025.5 5808,3025.5 6274.8,3492.3 C45.2@6274.8,3540 6277.4,3542.6 R23.1@6277.4,3720 ; 6233.78,3451.28 ccw(c6148.99,3536.06) 6268.9,3536.06 cw(c6148.99,3536.06) 6233.78,3451.28
  Bottom Layer w29.53: v8@5076.5,2479 v2(5076.5,3026)
  other v8: 5077,2479
NetC53_1: C53.1 C54.1 D5.1 L5.2 R52.1 | length 1361.1
  Top Layer w30.37: D5.1@6148.58,2234.5 D5.1@6148.58,2255.42
  Top Layer w39.37: L5.2@5652.25,2223.75 5757,2119 6096,2119 6137.5,2077.5 ; L5.2@5660.31,2234.5 ccw(c5705.74,2234.5) 5673.62,2202.38 ; D5.1@6148.58,2234.5 6148.58,2088.58 6137.5,2077.5 ; R52.1@6310,1900 C54.1@6100,1900 C53.1@6100,2040 6137.5,2077.5 ; 6148.58,2172.72 cw(c6210.36,2172.72) 6166.68,2216.4 ccw(c6210.36,2172.72) 6148.58,2172.72 ; 6148.58,2172.72 ccw(c6086.8,2172.72) 6130.49,2216.4 cw(c6086.8,2172.72) 6148.58,2172.72
NetD0_1: D0.1 R01.1 | length 161.1
  Top Layer w39.37: D0.1@6517.4,4080 6520,4082.6 R01.1@6520,4240
NetD1_1: D1.1 R11.1 | length 321.2
  Top Layer w25: R11.1@3560,3860 D1.1@3682.6,3860 ; 3591.6,3860 cw(c3591.6,3891.6) 3569.26,3869.26 ccw(c3591.6,3891.6) 3591.6,3860 ; 3591.6,3860 ccw(c3591.6,3828.4) 3569.26,3850.74 cw(c3591.6,3828.4) 3591.6,3860 ; 3650.99,3860 cw(c3650.99,3828.4) 3673.34,3850.74 ccw(c3650.99,3828.4) 3650.99,3860 ; 3650.99,3860 ccw(c3650.99,3891.6) 3673.34,3869.26 cw(c3650.99,3891.6) 3650.99,3860
NetD2_1: D2.1 R12.1 | length 142.6
  Top Layer w39.37: D2.1@2977.4,3860 R12.1@3120,3860
NetD5_2: D5.2 L5.1 Q5.3 | length 1035.5
  Top Layer w39.37: v11(5791.5,2234.5) D5.2@5971.42,2234.5 ; 5909.64,2234.5 cw(c5909.64,2172.72) 5953.32,2216.4 ccw(c5909.64,2172.72) 5909.64,2234.5 ; 5909.64,2234.5 ccw(c5909.64,2296.28) 5953.32,2252.6 cw(c5909.64,2296.28) 5909.64,2234.5
  Bottom Layer w40: v11(5791.5,2234.5) 5750,2276 5750,2751 5793.09,2794.09
  Bottom Layer w60: 5793.09,2794.09 Q5.3@5860,2794.09
NetDB9_2: DB9.2 U2.8 | length 2717.5
  Bottom Layer w15: v1(2520,2095) 2520,3148.5 3306,3934.5 3306,4088.5 3342.5,4125 3409.13,4125 DB9.2@3469.05,4065.08 ; 3425.07,4109.07 cw(c3381.08,4065.08) 3443.29,4065.08 ccw(c3381.08,4065.08) 3425.07,4109.07 ; 3425.07,4109.07 ccw(c3469.05,4153.06) 3469.05,4090.85 cw(c3469.05,4153.06) 3425.07,4109.07
NetDB9_3: DB9.3 U2.7 | length 2492.7
  Bottom Layer w15: v1(2570,2095) 2570,3118.5 3360,3908.5 DB9.3@3360,4065.08 ; 3360,4002.87 cw(c3422.21,4002.87) 3378.22,4046.86 ccw(c3422.21,4002.87) 3360,4002.87 ; 3360,4002.87 ccw(c3297.79,4002.87) 3341.78,4046.86 cw(c3297.79,4002.87) 3360,4002.87
NetFY_2: QY.3 风扇5V.2 | length 210.6
  Bottom Layer w20: QY.3@5520,1210.79 5630.79,1210.79 风扇5V.2@5660,1240 ; 5538.63,1210.79 cw(c5538.63,1229.42) 5525.46,1216.24 ccw(c5538.63,1229.42) 5538.63,1210.79 ; 5538.63,1210.79 ccw(c5538.63,1192.16) 5525.46,1205.33 cw(c5538.63,1192.16) 5538.63,1210.79
NetJ4_2: J4.2 U1.27 | length 1158
  Top Layer w13: v1(4349.5,2279.5) 4358.07,2288.07 U1.27@4358.07,2398.07 ; v1@4347.03,2281.97 ccw(c4320.36,2308.64) 4358.07,2308.64 cw(c4320.36,2308.64) v1@4347.03,2281.97
  Top Layer w15: v1@4524.5,2220 4524.75,2220.25 4527.7,2223.2 5116.8,2223.2 J4.2@5120,2220 ; v1@4526.27,2218.73 cw(c4537.04,2207.96) 4537.04,2223.2 ; 5059.11,2223.2 cw(c5059.11,2159.11) 5104.42,2204.42 ccw(c5066.82,2166.82) 5066.82,2220 ccw(c5066.82,2273.18) 5104.42,2235.58 cw(c5074.54,2265.46) 5074.54,2223.2
  Bottom Layer w13: v1(4349.5,2279.5) 4408.5,2220.5 v1(4524.5,2220.5)
NetP4_2: PWM1A.2 U9.3 | length 797
  Top Layer w25: v8(5459.5,1989) 5459.5,2084.5 U9.3@5460,2085
  Bottom Layer w25: PWM1A.2@5120,1560 5458.5,1898.5 5460.5,1898.5 5460.5,1988 v8(5459.5,1989) ; 5149.07,1589.07 cw(c5120,1618.14) 5120,1577.03 ccw(c5120,1618.14) 5149.07,1589.07 ; 5149.07,1589.07 ccw(c5178.14,1560) 5137.03,1560 cw(c5178.14,1560) 5149.07,1589.07
NetPcold_1: Pcold.1 R52.2 | length 523.9
  Bottom Layer w39.37: Pcold.1@6200,1660 6200,1672 6428,1900 v7(6450,1900) ; Pcold.1@6209.84,1660 cw(c6262.57,1660) 6225.29,1697.29 ccw(c6262.57,1660) Pcold.1@6209.84,1660 ; 6411.91,1883.91 cw(c6450,1845.81) 6450,1899.69 ccw(c6450,1845.81) 6411.91,1883.91
NetQ5_1: Q5.1 U9.6 | length 627.1
  Top Layer w29.53: U9.6@5460,2416.22 5460,2453 5510,2503 5756.91,2503 Q5.1@5860,2606.09 ; Q5.1@5831.44,2577.53 cw(c5860,2548.97) 5860,2589.36 ccw(c5860,2548.97) Q5.1@5831.44,2577.53 ; Q5.1@5831.44,2577.53 ccw(c5802.87,2606.09) 5843.27,2606.09 cw(c5802.87,2606.09) Q5.1@5831.44,2577.53
NetQX_1: QX.1 RX.2 | length 276.8
  Top Layer w20: RX.2@5377.4,1440 v8(5433.39,1440) ; 5415.04,1440 cw(c5415.04,1477.64) 5388.43,1451.02 ccw(c5415.04,1477.64) 5415.04,1440 ; 5415.04,1440 ccw(c5415.04,1402.36) 5388.43,1428.98 cw(c5415.04,1402.36) 5415.04,1440
  Bottom Layer w20: v8(5433.39,1440) QX.1@5482.6,1489.21 ; QX.1@5467.75,1474.36 cw(c5482.6,1459.51) 5482.6,1480.51 ccw(c5482.6,1459.51) QX.1@5467.75,1474.36
NetQY_1: QY.1 RY.2 | length 303.4
  Top Layer w20: RY.2@5377.4,1260 5380.9,1263.5 v8(5434.5,1263.5) ; RY.2@5388.43,1252.91 cw(c5413.99,1227.35) 5413.99,1263.5 ccw(c5413.99,1227.35) RY.2@5388.43,1252.91 ; RY.2@5388.43,1274.96 ccw(c5416.1,1302.63) 5416.1,1263.5 cw(c5416.1,1302.63) RY.2@5388.43,1274.96
  Bottom Layer w20: v8(5434.5,1263.5) 5434.5,1267.5 5476.21,1309.21 QY.1@5482.6,1309.21 ; 5456.84,1289.84 cw(c5482.6,1264.09) 5482.6,1300.51 ccw(c5482.6,1264.09) 5456.84,1289.84
NetR50_1: R50.1 U9.2 | length 307.2
  Top Layer w20: R50.1@5328.98,1894.96 ccw(c5302.36,1921.58) 5340,1921.58 ccw(c5377.64,1921.58) R50.1@5351.02,1894.96 ; R50.1@5340,1880 5340,2009.5 5365,2034.5 U9.2@5365,2085 ; 5347.83,2017.33 ccw(c5326.05,2039.11) U9.2@5355.68,2047.51
NetR51_1: R51.1 TR5.2 | length 644.9
  Top Layer w29.53: R51.1@5354.25,2529.75 5524.5,2700 TR5.2@5560,2700 ; R51.1@5360,2554.76 ccw(c5360,2601.27) 5392.89,2568.39 ; 5484.28,2659.78 cw(c5560,2584.05) 5560,2691.14 ccw(c5560,2584.05) 5484.28,2659.78 ; 5506.75,2682.25 cw(c5538.73,2650.27) 5556.52,2691.86 ccw(c5538.73,2650.27) 5506.75,2682.25 ; 5534.68,2710.18 cw(c5560,2684.87) 5560,2720.67 ccw(c5560,2684.87) 5534.68,2710.18
NetR51_2: R51.2 U9.8 | length 269.5
  Top Layer w20: U9.8@5263.15,2457.91 ccw(c5246.62,2474.44) 5270,2474.44 ccw(c5293.38,2474.44) U9.8@5276.85,2457.91 ; U9.8@5270,2416.22 5270,2524.8 R51.2@5285.2,2540 ; U9.8@5270,2461.74 cw(c5359.52,2461.74) R51.2@5296.22,2525.04 ; 5270,2510.02 cw(c5311.24,2510.02) R51.2@5282.08,2539.18
NMI: J2.74
PWM1A: J2.1 PWM1A.1 | length 590
  Top Layer w20: J2.1@4830.1,1405.91 ccw(c4831.31,1411.75) J2.1@4835.53,1407.53 ; J2.1@4834.15,1425.49 ccw(c4840.28,1455.25) 4861.76,1433.76 ; J2.1@4835.43,1379.37 4835.43,1407.43 4888,1460 ; J2.1@4835.43,1416.61 ccw(c4835.43,1438.78) J2.1@4851.11,1423.11 ; J2.1@4838.19,1445.08 ccw(c4849.26,1498.74) 4888,1460 ; PWM1A.1@5120,1460 4888,1460 ; 5072.86,1460 cw(c5072.86,1412.86) 5106.19,1446.19 ccw(c5072.86,1412.86) 5072.86,1460 ; 5072.86,1460 ccw(c5072.86,1507.14) 5106.19,1473.81 cw(c5072.86,1507.14) 5072.86,1460
PWM1B: J2.2
PWM2A: J2.3 P9.1 | length 1510.4
  Top Layer w20: J2.3@4756.69,1379.37 4756.69,1337.31 4784.5,1309.5 4964.5,1309.5 5033.5,1378.5 5878.5,1378.5 P9.1@5940,1440 ; J2.3@4764.41,1349.74 ccw(c4811.61,1349.14) 4778.23,1315.77 ; J2.3@4769.55,1348.5 ccw(c4797.87,1338.57) 4776.65,1317.35 ; 5906.66,1406.66 cw(c5940,1373.33) 5940,1420.47 ccw(c5940,1373.33) 5906.66,1406.66 ; 5906.66,1406.66 ccw(c5873.33,1440) 5920.47,1440 cw(c5873.33,1440) 5906.66,1406.66
PWM2B: J2.4 P9.2 | length 1436
  Top Layer w15: J2.4@4756.69,1204.59 4756.69,1263.36 4774.42,1281.08 5000.58,1281.08
  Top Layer w20: J2.4@4756.69,1209.63 J2.4@4756.69,1223.69 ; 5000.58,1281.08 5059.5,1340 P9.2@5940,1340 ; 5892.86,1340 cw(c5892.86,1292.86) 5926.19,1326.19 ccw(c5892.86,1292.86) 5892.86,1340 ; 5892.86,1340 ccw(c5892.86,1387.14) 5926.19,1353.81 cw(c5892.86,1387.14) 5892.86,1340
PWM3A: 
PWM3B: 
PWM4A: J2.17
PWM4B: J2.18
PWM5A: J2.19
PWM5B: J2.20
PWM6A: J2.21
PWM6B: J2.22
R/W: J1.70
READY: J1.71
RED_IND_A: J1.39 R11.2 | length 525.3
  Top Layer w20: J1.39@3329.74,3721.37 ccw(c3306.48,3744.63) 3339.37,3744.63 ccw(c3372.26,3744.63) J1.39@3349,3721.37 ; J1.39@3333.91,3694.35 ccw(c3320.74,3707.53) 3339.37,3707.53 ccw(c3358,3707.53) J1.39@3344.83,3694.35 ; J1.39@3339.37,3659.37 3339.37,3825.37 3369.5,3855.5 3480.7,3855.5 R11.2@3485.2,3860 ; 3446.2,3855.5 ccw(c3446.2,3895.06) 3474.17,3867.09 cw(c3446.2,3895.06) 3446.2,3855.5 ; 3448.92,3855.5 cw(c3448.92,3819.78) 3474.17,3845.04 ccw(c3448.92,3819.78) 3448.92,3855.5
REFCAPA: C38.2 C39.2 U1.54 | length 508.1
  Top Layer w13: U1.54@4358.07,2850.82 4358.07,2950.07 4476.5,3068.5 cw(c4517.56,3027.43) C38.2@4517.56,3085.51 ; 4481.86,3073.86 cw(c4510.88,3044.83) C38.2@4515.44,3085.63 ; 4484.34,3076.34 4512.6,3104.6 v2(4521.5,3104.6) ; 4488.48,3080.48 ccw(c4464.37,3104.6) 4498.47,3104.6 cw(c4464.37,3104.6) 4488.48,3080.48 ; C38.2@4496.06,3088.06 cw(c4521.5,3062.62) 4521.5,3098.6 ccw(c4521.5,3062.62) C38.2@4496.06,3088.06
REFCAPB: C36.2 C37.2 U1.56 | length 478.6
  Top Layer w13: U1.56@4318.7,2850.82 4318.7,2959.5 ; 4319.1,2959.1 4401.5,3041.5 v2(4401.5,3104.6) ; 4401.5,3058.51 cw(c4447.59,3058.51) 4415,3091.1 ccw(c4447.59,3058.51) 4401.5,3058.51 ; 4401.5,3058.51 ccw(c4355.41,3058.51) 4388,3091.1 cw(c4355.41,3058.51) 4401.5,3058.51 ; C36.2@4401.5,3090.11 cw(c4415.99,3090.11) 4405.74,3100.36 ccw(c4415.99,3090.11) C36.2@4401.5,3090.11 ; C36.2@4401.5,3090.11 ccw(c4387.01,3090.11) 4397.26,3100.36 cw(c4387.01,3090.11) C36.2@4401.5,3090.11
REFCAPC: C34.2 C35.2 U1.58 | length 451.7
  Top Layer w12: U1.58@4279.33,2850.82 4279.33,3028.5 ; 4281.5,3028.5 v2(4281.5,3104.6) ; 4281.5,3057.3 cw(c4328.8,3057.3) 4295.35,3090.75 ccw(c4328.8,3057.3) 4281.5,3057.3 ; 4281.5,3057.3 ccw(c4234.2,3057.3) 4267.65,3090.75 cw(c4234.2,3057.3) 4281.5,3057.3 ; C34.2@4281.5,3088.91 cw(c4297.19,3088.91) 4286.1,3100 ccw(c4297.19,3088.91) C34.2@4281.5,3088.91 ; C34.2@4281.5,3088.91 ccw(c4265.81,3088.91) 4276.9,3100 cw(c4265.81,3088.91) C34.2@4281.5,3088.91
RS: J1.72
SCIRXDB: J2.60 P8.5 | length 5135.1
  Top Layer w15: v1(3437.5,3762.5) 4904,3762.5 5086.5,3580 P8.5@5120,3580 ; 5025.21,3641.29 ccw(c5120,3736.08) 5120,3602.03 cw(c5120,3736.08) 5025.21,3641.29 ; 5050.82,3615.68 ccw(c5120,3684.87) 5120,3587.03 cw(c5120,3684.87) 5050.82,3615.68 ; 5076.42,3590.08 ccw(c5120,3633.66) 5120,3572.03 cw(c5120,3633.66) 5076.42,3590.08
  Bottom Layer w20: v1(2551.97,1209.63) 2551.97,1284.97 3080.5,1813.5 3080.5,3134 3437,3490.5 v1@3437,3759
SCIRXDC: J2.64 U2.9 | length 747.3
  Bottom Layer w15: v1(2395.5,1212.5) 2350.5,1257.5 2350.5,1503.5 2521,1674 v1(2521,1870.5)
SCITXDB: J2.59 P8.3 | length 4687.8
  Top Layer w15: v1(3381.5,3794) 3768.25,3794 4541.75,3794 4928.5,3794 5042.5,3680
  Top Layer w20: 5042.5,3680 P8.3@5120,3680 ; 5072.86,3680 cw(c5072.86,3632.86) 5106.19,3666.19 ccw(c5072.86,3632.86) 5072.86,3680 ; 5072.86,3680 ccw(c5072.86,3727.14) 5106.19,3693.81 cw(c5072.86,3727.14) 5072.86,3680
  Bottom Layer w20: v1(2551.97,1379.37) 2551.97,1425.97 3029.5,1903.5 3029.5,3182.5 3382,3535 v1@3382,3789.5
SCITXDC: J2.63 U2.10 | length 568.3
  Top Layer w15: v1(2569.5,1874.5) U2.10@2570,1875
  Bottom Layer w15: v1(2394.49,1379.37) 2394.49,1485.49 2569.5,1660.5 v1(2569.5,1874.5)
SCLA: J2.57
SDAA: J2.55
TCK: J1.31 JTAG.9 JTAG.11 | length 3608.2
  Top Layer w15: JTAG.9@1460,2700 JTAG.11@1460,2800 ; v10@1582.5,2993 3458,2993 3615,3150 3615,3544 3654.33,3583.33 J1.31@3654.33,3659.37 ; J1.31@3642.93,3621.6 cw(c3615.41,3594.08) 3654.33,3594.08 cw(c3693.25,3594.08) J1.31@3665.73,3621.6 ; J1.31@3647.11,3622.62 cw(c3629.67,3605.18) 3654.33,3605.18 cw(c3679,3605.18) J1.31@3661.56,3622.62 ; 1460,2746.82 cw(c1513.18,2746.82) 1475.58,2784.42 ccw(c1513.18,2746.82) 1460,2746.82 ; 1460,2746.82 ccw(c1406.82,2746.82) 1444.42,2784.42 cw(c1406.82,2746.82) 1460,2746.82 ; 1460,2753.18 cw(c1406.82,2753.18) 1444.42,2715.58 ccw(c1406.82,2753.18) 1460,2753.18 ; 1460,2753.18 ccw(c1513.18,2753.18) 1475.58,2715.58 cw(c1513.18,2753.18) 1460,2753.18
  Bottom Layer w15: JTAG.11@1460,2800 1529.5,2800 1582.5,2853 v10(1582.5,2992.5) ; 1513.18,2800 cw(c1513.18,2853.18) 1475.58,2815.58 ccw(c1513.18,2853.18) 1513.18,2800 ; 1513.18,2800 ccw(c1513.18,2746.82) 1475.58,2784.42 cw(c1513.18,2746.82) 1513.18,2800
TDI: J1.27 JTAG.3 | length 3679.8
  Top Layer w15: v1@1614.5,2869 3531.5,2869 3771.5,3109 3771.5,3554.5 3811.81,3594.81 ; J1.27@3800.57,3621.45 cw(c3774.65,3594.81) 3811.81,3594.81 ; J1.27@3804.59,3622.62 cw(c3787.15,3605.18) 3811.81,3605.18 cw(c3836.48,3605.18) J1.27@3819.04,3622.62 ; J1.27@3811.81,3659.37 3811.81,3594.81 ; J1.27@3823.06,3621.45 ccw(c3848.97,3594.81) 3811.81,3594.81
  Bottom Layer w15: JTAG.3@1460,2400 1557.5,2400 1614.5,2457 v1(1614.5,2870) ; 1513.18,2400 cw(c1513.18,2453.18) 1475.58,2415.58 ccw(c1513.18,2453.18) 1513.18,2400 ; 1513.18,2400 ccw(c1513.18,2346.82) 1475.58,2384.42 cw(c1513.18,2346.82) 1513.18,2400
TDO: J1.28 JTAG.7 | length 3225.3
  Top Layer w15: JTAG.7@1460,2600 1764.5,2600 1987,2822.5 3551,2822.5 3811.81,3083.31 J1.28@3811.81,3489.63 ; J1.28@3800.41,3424.86 cw(c3772.89,3397.34) 3811.81,3397.34 cw(c3850.73,3397.34) J1.28@3823.21,3424.86 ; J1.28@3804.59,3452.88 cw(c3787.15,3435.44) 3811.81,3435.44 cw(c3836.48,3435.44) J1.28@3819.04,3452.88 ; 1513.18,2600 cw(c1513.18,2653.18) 1475.58,2615.58 ccw(c1513.18,2653.18) 1513.18,2600 ; 1513.18,2600 ccw(c1513.18,2546.82) 1475.58,2584.42 cw(c1513.18,2546.82) 1513.18,2600
TMS: J1.25 JTAG.1 | length 3680
  Top Layer w15: v1(1641.25,2552.25) 1779.75,2552.25 2012.5,2785 3578,2785 3850.5,3057.5 3850.5,3560 3890.55,3600.05 ; J1.25@3880.66,3620.27 cw(c3864.95,3600.05) 3890.55,3600.05 ; J1.25@3883.33,3622.62 cw(c3865.89,3605.18) 3890.55,3605.18 cw(c3915.22,3605.18) J1.25@3897.78,3622.62 ; J1.25@3890.55,3659.37 3890.55,3600.05 ; J1.25@3900.44,3620.27 ccw(c3916.15,3600.05) 3890.55,3600.05
  Bottom Layer w15: JTAG.1@1460,2300 1568,2300 1641.25,2373.25 v1(1641.25,2552.25) ; 1513.18,2300 cw(c1513.18,2353.18) 1475.58,2315.58 ccw(c1513.18,2353.18) 1513.18,2300 ; 1513.18,2300 ccw(c1513.18,2246.82) 1475.58,2284.42 cw(c1513.18,2246.82) 1513.18,2300
TRST: J1.26 JTAG.2 | length 3704.4
  Top Layer w15: v10(1671,2499) 1777,2499 2021.5,2743.5 3603,2743.5 3890.55,3031.05 J1.26@3890.55,3489.63 ; J1.26@3879.15,3424.86 cw(c3851.63,3397.34) 3890.55,3397.34 cw(c3929.47,3397.34) J1.26@3901.95,3424.86 ; J1.26@3883.33,3452.88 cw(c3865.89,3435.44) 3890.55,3435.44 cw(c3915.22,3435.44) J1.26@3897.78,3452.88
  Bottom Layer w15: JTAG.2@1360,2300 1437,2223 1534.5,2223 1671,2359.5 v10(1671,2499) ; 1397.6,2262.4 cw(c1435.21,2300) 1382.03,2300 ccw(c1435.21,2300) 1397.6,2262.4 ; 1397.6,2262.4 ccw(c1360,2224.79) 1360,2277.97 cw(c1360,2224.79) 1397.6,2262.4
TZI: J2.75
VIN1_LED17: R23.2 测量信号输入.1 | length 279.6
  Top Layer w39.37: 测量信号输入.1@6020,3880 6095,3880 6202.6,3772.4 R23.2@6202.6,3720
VIN2_LED19: R22.2 测量信号输入.2 | length 185.9
  Top Layer w39.37: 测量信号输入.2@5920,3880 5920,3782.6 R22.2@5982.6,3720
VIN3_LED22: R21.2 测量信号输入.3 | length 297.9
  Top Layer w39.37: 测量信号输入.3@5820,3880 5837.4,3862.6 R21.2@5837.4,3720 ; 测量信号输入.3@5813.04,3873.04 cw(c5754.23,3814.23) 5837.4,3814.23 ccw(c5754.23,3814.23) 测量信号输入.3@5813.04,3873.04
VIN4: R20.2 VIN4.1 | length 505.9
  Top Layer w39.37: VIN4.1@5502.5,4060 5521,4060 5617.4,3963.6 R20.2@5617.4,3720 ; VIN4.1@5502.5,4050.16 cw(c5502.5,3981.73) 5550.88,4030.12 ccw(c5502.5,3981.73) VIN4.1@5502.5,4050.16
WE: J1.69
XA0: J1.37
XA1: J1.38
XA3: J1.40
XA5: J1.42
XA6: J1.43
XA7: J1.44
XA8: J1.45
XA9: J1.46
XA12: J1.49
XA13: J1.50
XA14: J1.51
XA15: J1.52
XA20: J1.57
XA21: J1.58
XA22: J1.59
XA23: J1.60
XD16: J1.17
XD17: J1.18
XD18: J1.19
XD19: J1.20
XD20: J1.21
XD21: J1.22
XD22: J1.23
XD23: J1.24
XINT3: J2.71
XINT4: J2.72
XINT6: J2.76
XZCS0: J1.63
XZCS6: J1.65
pads on no net: DB9.1 DB9.4 DB9.6 DB9.7 DB9.8 DB9.9 DB9.10 DB9.11 J1.32 J1.73 J1.74 J1.76 J2.7 J2.8 J2.14 J2.16 J2.23 J2.24 J2.28 J2.29 J2.30 J2.32 J2.61 J2.62 J2.69 J2.70 J2.77 J2.78 JTAG.6 P2.3.3 P8.2 P8.4 P8.6 P8.8 Pcold.3 U2.11 U2.12 U2.13 U2.14 U9.1 U9.4 U9.7

## Polygon pours and split planes (outlines as drawn)
AGND on Top Layer "Top Layer-d" (solid, remove dead copper): 5200,4452 6717,4452 6754.5,4414.5 6754.5,1171.5 6712.5,1129.5 5059,1129.5 5034,1154.5 5034,3373 5047,3386 5048,3387 5132.5,3387 5137,3387 5192.5,3442.5 5192.5,4444.5 5200,4452
DGND on Top Layer "Top Layer-d" (solid, remove dead copper): 1313.5,4450 5130,4450 5174.5,4405.5 5174.5,3441 5131.5,3398 5041.5,3398 5036,3398 5014,3376 5014,1125.5 4998.5,1110 1333,1110 1289,1154 1289,4425.5 1313.5,4450
AGND on Bottom Layer "Top Layer-d" (solid, remove dead copper): 5207,4462 6707,4462 6756,4413 6756,1172.5 6711,1127.5 5062,1127.5 5034,1155.5 5034,3374 5047.5,3387.5 5137.5,3387.5 5192.5,3442.5 5192.5,3443.5 5192.5,4459.5 5195,4462
DGND on Bottom Layer "Top Layer-d" (solid, remove dead copper): 1313,4450.5 5129.5,4450.5 5175,4405 5175,3446 5129.5,3400.5 5040,3400.5 5035,3395.5 5020,3380.5 5020,3367.5 5020,1134.5 5001,1115.5 1329.5,1115.5 1290,1155 1290,4427.5 1313,4450.5

## Keep-outs
Keep-Out Layer:
  lines w10: 1269.75,4445 cw(c1320,4445) 1315,4495 6746.71,4495 ; 1270,4445 1270,1145.25 ccw(c1320,1150.25) 1320,1100 ; 1320,1098.87 6740,1098.87 ccw(c6735,1148.87) 6785.25,1148.87 6785.88,4450 ; 6735,4495.25 cw(c6735,4445) 6785,4450

## Other copper
Top Layer:
  text "NEU" at 6119,3068 h120

## Silkscreen, mask and mechanical layers (free items; w line width, h text height)
Top Overlay:
  lines w10: 1610,3624 1610,1119 4995,1119 4995,3624 ; 1610,3640 1610,3754.5 4995,3754.5 4995,3640
  text "1" at 3118,4153.5 h60 r180
  text "1" at 5568,4080.5 h60 r180
  text "1" at 6074.5,3901 h60 r180
  text "1" at 2690.5,3900.5 h60 r180
  text "1" at 5015.5,3900 h60 r180
  text "1" at 2356.5,3894.5 h60 r180
  text "1" at 4662,3894.5 h60 r180
  text "1" at 2018.5,3889.5 h60 r180
  text "1" at 4327.5,3887 h60 r180
  text "1" at 5051.5,3756 h60
  text "3.3V" at 5088.5,3384 h50
  text "近红外水分仪" at 5631.5,3346 h110
  text "MCU控制板.LYK" at 5640,3214 h110
  text "1" at 5619,2583 h60
  text "1" at 5872.5,2521 h60 r90
  text "3.3V" at 5224,2286.5 h60 r90
  text "1" at 1449.5,2202.5 h60 r270
  text "1" at 6751.5,2173.5 h60 r90
  text "GND" at 5222,2068 h60 r90
  text "1" at 1532,2061 h60 r270
  text "1" at 1530,1677 h60 r270
  text "1" at 6154.5,1639.5 h60
  text "1" at 6734.5,1603 h60 r90
  text "1" at 5203,1433 h60
  text "1" at 6143,1429 h60
  text "1" at 5866.5,1426 h60
  text "1" at 5839.5,1221 h60